# Altium PCB PCB2.PcbDoc
Units mm, origin at the board's own origin, x right, y up, seen from the top; angles counter-clockwise.
Board outline 146.05 x 94.87 mm, 2 copper layers (Top Layer, Bottom Layer); 31 components, 27 nets, 109 pads, 18 vias.
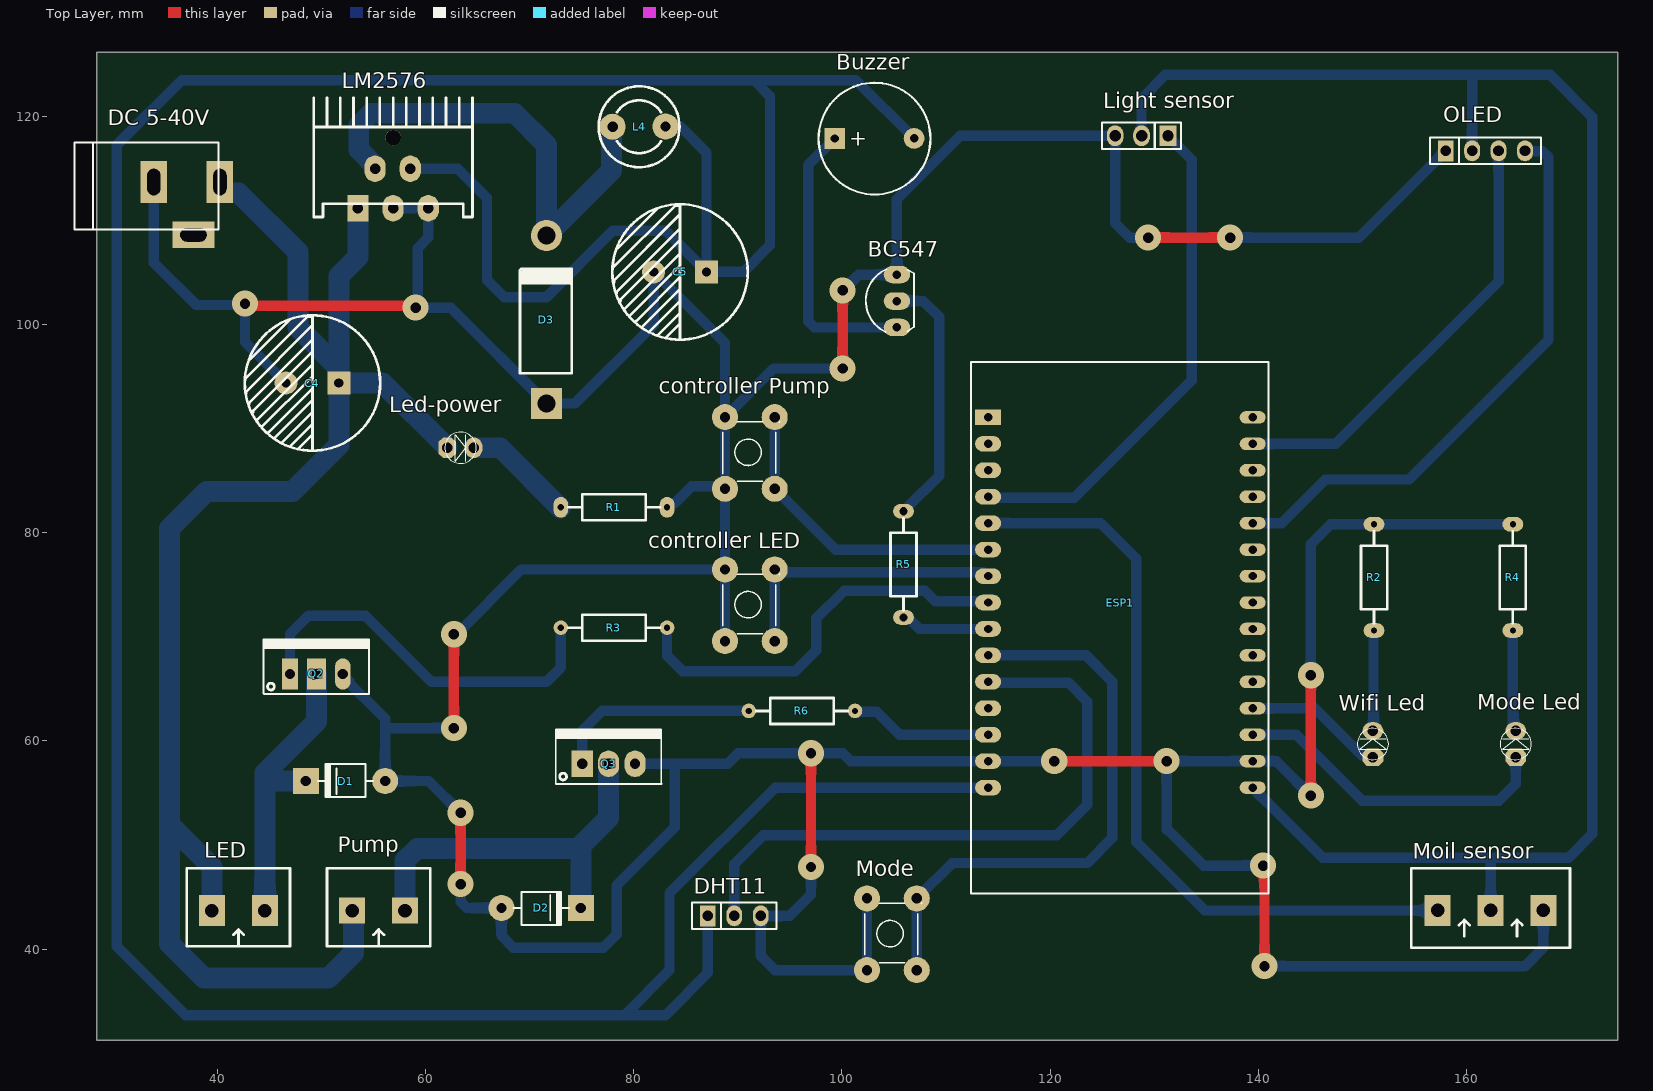
[diagram p0: Top Layer view]
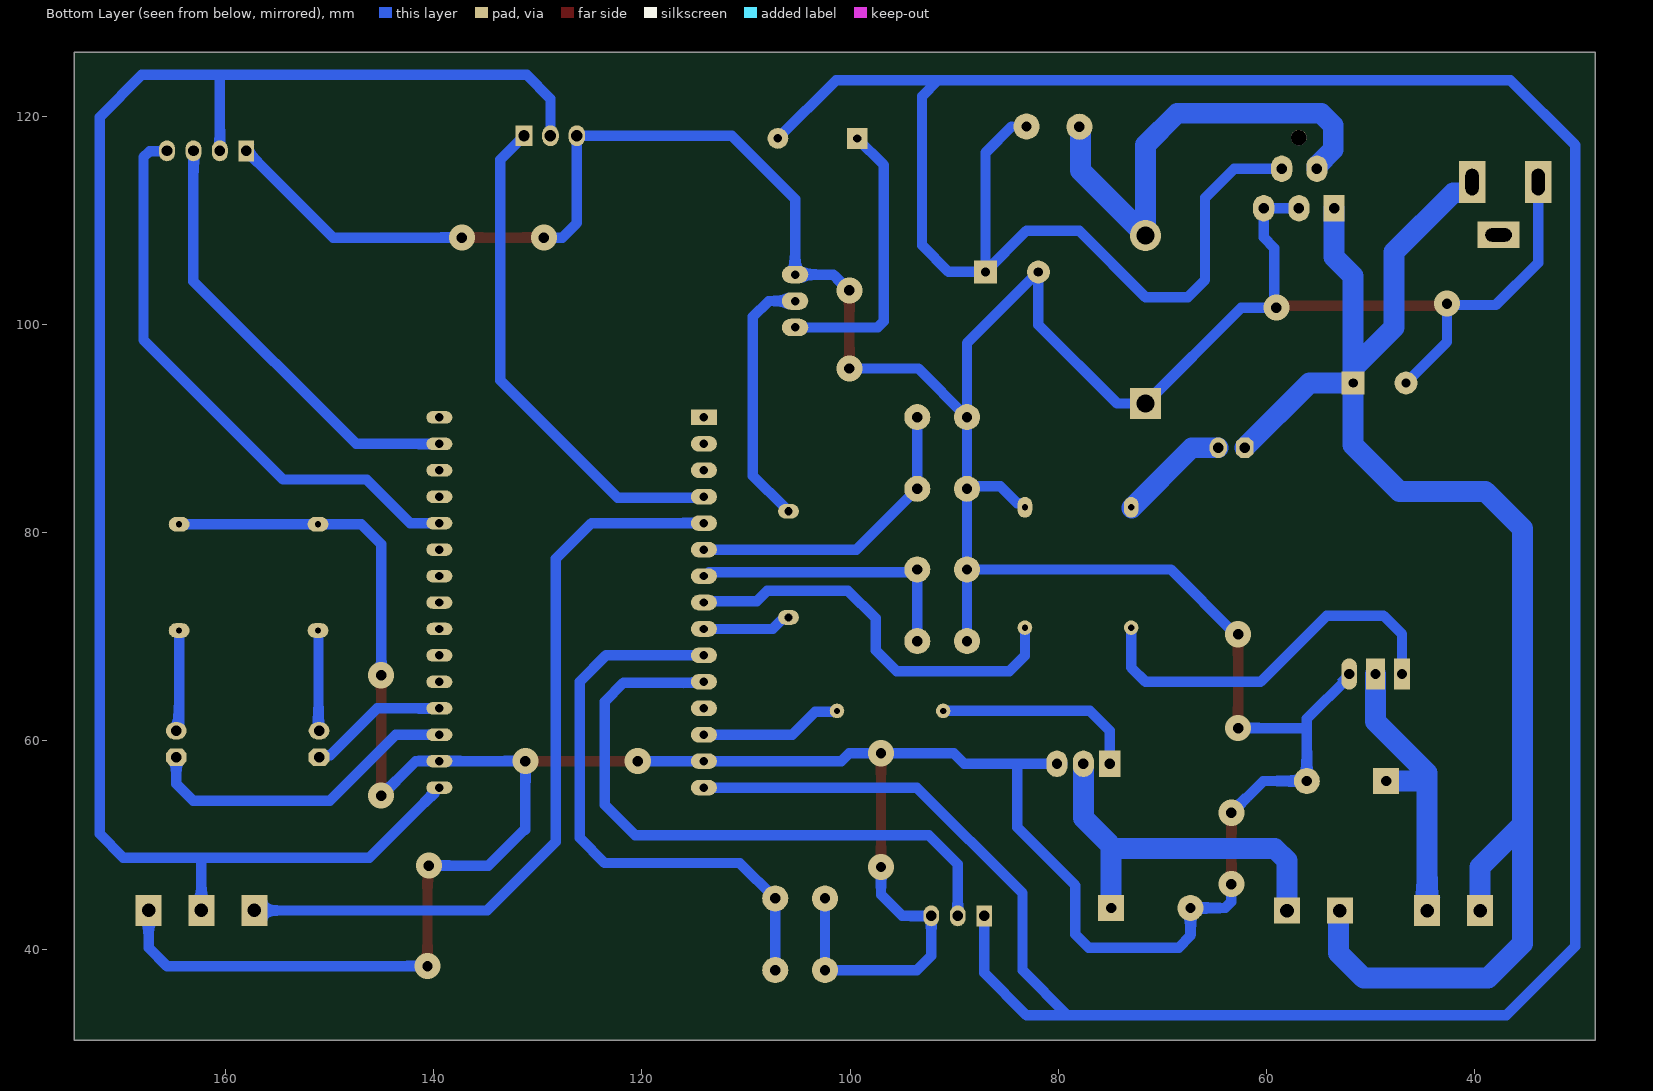
[diagram p1: Bottom Layer view, seen from below]
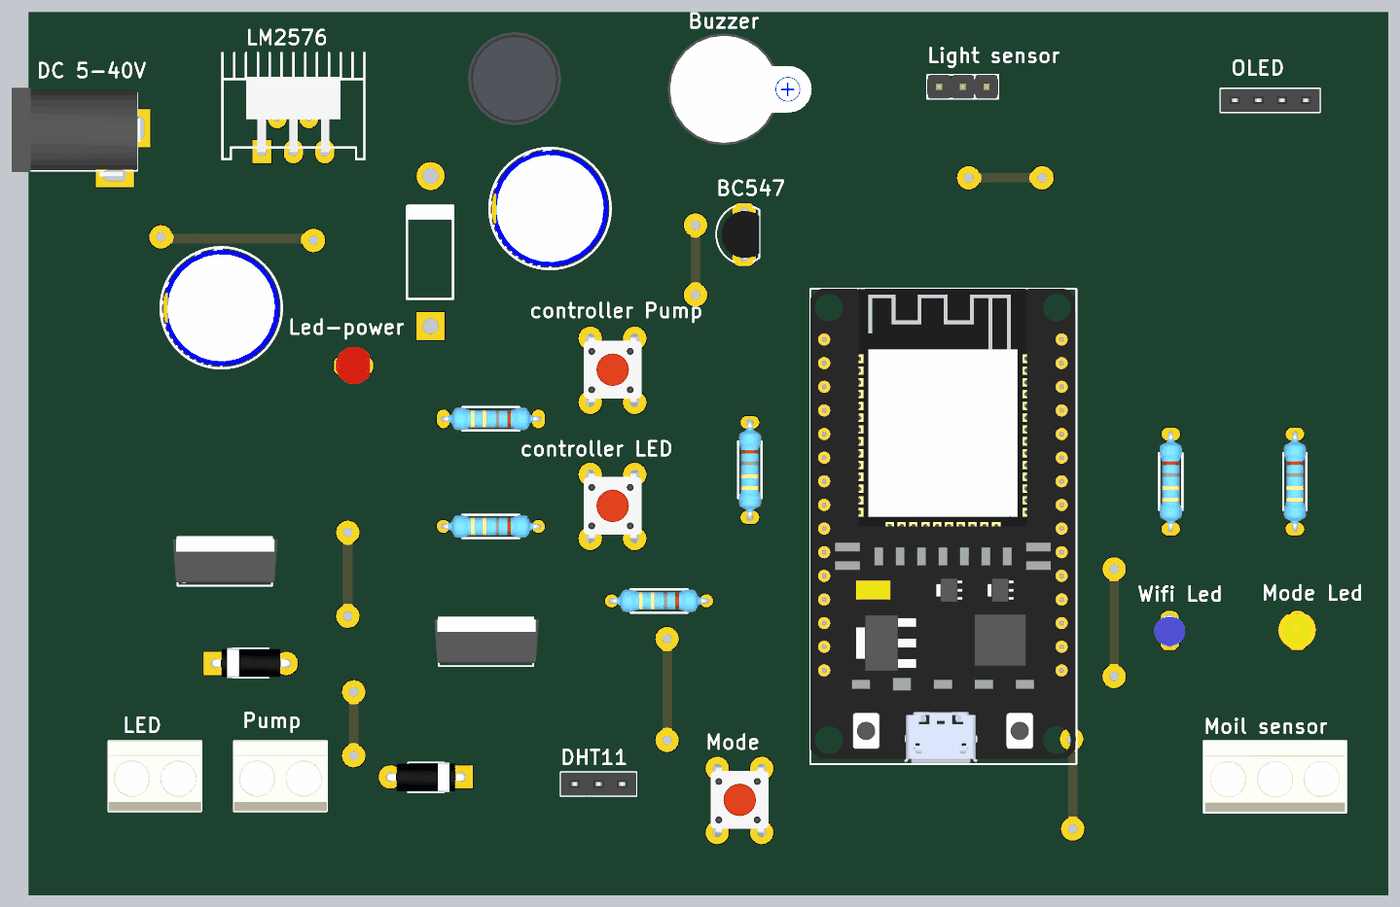
[diagram p2: 3D render of the assembled board from above, using the file's embedded part models]

## Layer stack, top to bottom
Top Solder: solder mask 0.0102, Solder Resist, Dk 3.5
Top Layer: signal copper 0.0356
Dielectric 1: dielectric 0.32, FR-4, Dk 4.8
Bottom Layer: signal copper 0.0356
Bottom Solder: solder mask 0.0102, Solder Resist, Dk 3.5

## Board outline
28.448,31.242 174.498,31.242 174.498,126.111 28.448,126.111

## Design rules (kind name [scope] priority, off if disabled: settings)
Clearance [All] p1: gap=0.254 ignorepadtopadclearanceinfootprint=FALSE except(0: Arc-Hole Track-Hole SMDPad-Hole THPad-Hole Via-Hole Fill-Hole Poly-Hole Region-Hole Text-Hole)
PolygonConnect [All] p1: connectstyle=Relief reliefconductorwidth=0.254 reliefentries=4 polygonreliefangle="90 Angle" airgapwidth=0.254
RoutingVias [All] p1: holewidth=1 width=2.5 viastyle="Through Hole" minholewidth=1 minwidth=2.5 maxholewidth=1 maxwidth=2.5
SolderMaskExpansion [All] p1: expansion=0.102 istentingtop=FALSE
Width [All] p1: maxlimit=2 minlimit=0.254 preferedwidth=1 toplayer_maxwidth=1 toplayer_prefwidth=0.254 bottomlayer_minwidth=1 minimp=50.000000 maximp=50.000000 favimp=50.000000
30 further rules are at their usual default settings.

## Components (designator, comment, footprint, x,y, rotation, side; value= is the part's Value field where it differs from the comment)
BC547 "BC 546" QTO-92 105.283,102.235 r90 top value="BC 546,BC 547,BC 548" (schematic designator Q1)
Buzzer "Coi Chip Speaker" "Coi Chip Speacker" 99.314,117.843 r0 top (schematic designator LS1)
C4 "1000uF" "tu hoa 13mm" 49.149,94.361 r180 top
C5 "1000uF" "tu hoa 13mm" 84.455,105.029 r180 top
"controller LED" "SW" SW4 88.57,69.901 r90 top value="Button chip 4 pin" (schematic designator SW2)
"controller Pump" "SW" SW4 88.57,84.531 r90 top value="Button chip 4 pin" (schematic designator SW1)
D1 "100v" "DIODE 1A" 57.404,56.134 r0 top
D2 "100v" "DIODE 1A" 66.04,43.942 r180 top
D3 "1N5822" "DIODE 10A" 71.628,100.457 r90 top
"DC 5-40V" "POWER" DC-IN 37.084,111.125 r0 top (schematic designator ON/OFF1)
DHT11 "JP 1x3 2.54" "JP 1x3 CT" 87.122,43.18 r0 top (schematic designator JP2)
ESP1 "ESP32 DEVKIT" "ESP32 WROOM 32 KIT" 114.046,91.059 r0 top
L4 "Conductor" "CUON CAM 200mil" 80.518,118.974 r0 top
LED "KF2" KF2-5.08#1 42.037,43.688 r180 top (schematic designator J3)
Led-power "LED 3mm" LED-3MM-RED 62.103,88.138 r0 top (schematic designator L1)
"Light sensor" "JP 1x3 2.54" "JP 1x3 DT" 131.318,118.11 r180 top (schematic designator JP?)
LM2576 "LM2576T-5.0" LM2576t 56.871,115.392 r0 top (schematic designator U2)
Mode "SW" SW4 102.21,38.303 r90 top value="Button chip 4 pin" (schematic designator SW3)
"Mode Led" "LED 3mm" LED-3MM-YELLOW 164.719,58.42 r90 top (schematic designator L3)
"Moil sensor" "KF3" KF3-5.08 157.226,43.701 r0 top (schematic designator J1)
OLED "JP4" JP4-C1T 157.988,116.656 r0 top (schematic designator C3)
Pump "KF2" KF2-5.08#2 55.499,43.688 r180 top (schematic designator J4)
Q2 "TIP122" QTO-220#1 46.99,66.421 r0 top
Q3 "TIP122" QTO-220#2 75.057,57.785 r0 top
R1 "2k" "tro vach 1/4w"#1 78.105,82.423 r0 top
R2 "330" "tro vach 1/4w"#1 151.111,75.692 r90 top
R3 "330" "tro vach 1/4w"#2 78.105,70.866 r0 top
R4 "330" "tro vach 1/4w"#1 164.445,75.692 r90 top
R5 "1k" "tro vach 1/4w"#3 105.918,76.942 r90 top
R6 "330" "tro vach 1/4w"#2 96.159,62.865 r0 top
"Wifi Led" "LED 3mm" LED-3MM-BLUE 151.003,59.817 r90 top (schematic designator L2)

## Footprints (in the part's own frame and the unit in brackets; to place one, negate y for a bottom-side part, rotate by r counter-clockwise, add the part's x,y. Pads: shape width x height; smd on the part's side, far side on the other; paste and mask are expansions set on the pad)
"Coi Chip Speacker" [mm]
  rect 2x2 hole 0.8: 1(0,0)
  round 2 hole 0.8: 2(7.62,0.013)
  silkscreen extent -1.55,-5.38 9.18,5.36, body extent -2.22,-6 13.24,6, height 4.5
"CUON CAM 200mil" [mm]
  round 2.5 hole 1: 1(-2.54,0) 2(2.54,0.025)
  silkscreen extent -3.88,-3.89 3.89,3.89, body extent -4.87,-4.98 5.13,5.02, height 12.02
DC-IN [mil] "Jac DC input"
  rect 100x160 hole 50 slot 100 at 90 deg: 1(125,100) 2(-125,100)
  rect 160x100 hole 50 slot 100 at 0 deg: 3(25,-100)
  silkscreen extent -425,-80 120,250, body extent -410,-105 134,269, height 434
"DIODE 1A" [mm] "Diode 1A"
  round 2.5 hole 1: 1(-1.27,0)
  rect 2.5x2.5 hole 1: 2(-8.89,0)
  silkscreen extent -7.75,-1.55 -2.41,1.65, body extent -9.29,-1.55 -0.87,1.65, height 3.1
"DIODE 10A" [mm]
  rect 3x3 hole 1.7: 1(-8.064,0)
  round 3 hole 1.7: 2(8.064,0)
  silkscreen extent -5.14,-2.41 4.89,2.54
"ESP32 WROOM 32 KIT" [mm]
  rect 2.5x1.5 hole 0.8: 1(0,0)
  oval 2.5x1.5 hole 0.8: 2(0,-2.54) 3(0,-5.08) 4(0,-7.62) 5(0,-10.16) 6(0,-12.7) 7(0,-15.24) 8(0,-17.78) 9(0,-20.32) 10(0,-22.86) 11(0,-25.4) 12(0,-27.94) 13(0,-30.48) 14(0,-33.02) 15(0,-35.56)
  oval 2.5x1.2 hole 0.8: 16(25.4,-35.56) 17(25.4,-33.02) 18(25.4,-30.48) 19(25.4,-27.94) 20(25.4,-25.4) 21(25.4,-22.86) 22(25.4,-20.32) 23(25.4,-17.78) 24(25.4,-15.24) 25(25.4,-12.7) 26(25.4,-10.16) 27(25.4,-7.62) 28(25.4,-5.08) 29(25.4,-2.54) 30(25.4,0)
  silkscreen extent -1.65,-45.72 26.92,5.33, body extent -1.65,-45.6 26.85,5.33, height 10.49
JP4-C1T [mm] "4 row, straight, gold plating"
  rect 1.52x2 hole 1.02: 1(0,0)
  oval 1.52x2 hole 1.02: 2(2.54,0) 3(5.08,0) 4(7.62,0)
  silkscreen extent -1.52,-1.27 9.14,1.27, body extent -1.52,-1.25 9.14,1.25, height 8.51
"JP 1x3 CT" [mm]
  rect 1.52x2 hole 1.02: 1(0,0)
  oval 1.52x2 hole 1.02: 2(2.54,0) 3(5.08,0)
  silkscreen extent -1.52,-1.27 6.6,1.27, body extent -1.52,-1.25 6.6,1.25, height 8.51
"JP 1x3 DT" [mm]
  rect 1.6x2 hole 1.1: 1(0,0)
  oval 1.6x2 hole 1.1: 2(2.54,0) 3(5.08,0)
  silkscreen extent -1.27,-1.27 6.35,1.27, body extent -1.27,-1.27 6.35,1.27, height 8.54
KF2-5.08#1 [mm]
  rect 2.5x3 hole 1.3: 1(-2.54,0) 2(2.54,0)
  silkscreen extent -4.95,-4.08 4.95,3.43, body extent -5,-4.07 5,3.43, height 10
KF2-5.08#2 [mm]
  rect 2.5x2.5 hole 1.3: 1(-2.54,0) 2(2.54,0)
  silkscreen extent -4.95,-4.08 4.95,3.43, body extent -5,-4.07 5,3.43, height 10
KF3-5.08 [mm]
  rect 2.5x3 hole 1.3: 1(0,0) 2(5.08,0) 3(10.147,0)
  silkscreen extent -2.54,-3.58 12.7,4.06, body extent -2.42,-3.51 12.58,3.99, height 10
LED-3MM-BLUE [mil]
  oct 65x78.74 hole 40: 1(-55,0)
  oval 65x78.74 hole 40: 2(45,0)
  silkscreen extent -64,-59 54,59, body extent -72,-65 54,65, height 184
LED-3MM-RED [mil]
  oct 65x78.74 hole 40: 1(0,0)
  oval 65x78.74 hole 40: 2(100,0)
  silkscreen extent -9,-59 109,59, body extent -27,-77 117,80, height 181
LED-3MM-YELLOW [mil]
  oct 65x78.74 hole 40: 1(0,0)
  oval 65x78.74 hole 40: 2(100,0)
  silkscreen extent -9,-59 109,59, body extent -27,-77 117,80, height 181
LM2576t [mil]
  rect 80x100 hole 40: 1(-132,-167.09)
  oval 80x100 hole 40: 2(-67,-18) 3(1,-167) 4(66,-18) 5(134,-167)
  round 59.06 hole 59.06: ""(1,100)
  silkscreen extent -299,-200 301,250, body extent -199,-175 201,150, height 859
QTO-92 [mil] "TO-92"
  oval 66x100 hole 32: 1(-100,0) 2(0,0) 3(100,0)
  silkscreen extent -117,-65 120,118, body extent -109,-66 109,95, height 245
QTO-220#1 [mm] "TO-220 - 1-2-3"
  rect 1.5x3 hole 0.991: 1(0,0)
  rect 1.8x3 hole 0.991: 2(2.54,0)
  oval 1.5x3 hole 0.991: 3(5.08,0)
  silkscreen extent -2.54,-1.93 7.62,3.3, body extent -3.02,-1.63 8.19,3.06, height 19.17
QTO-220#2 [mm] "TO-220 - 1-2-3"
  rect 2.032x2.54 hole 0.991: 1(0,0)
  oval 2.032x2.54 hole 0.991: 2(2.54,0) 3(5.08,0)
  silkscreen extent -2.54,-1.93 7.62,3.3, body extent -3.02,-1.63 8.19,3.06, height 19.17
SW4 [mm] "SW button 4pin, 250 x250 mil"
  round 2.5 hole 1: 1(-0.33,-0.203) 1(6.553,-0.203) 2(-0.33,-4.978) 2(6.553,-4.978)
  silkscreen extent 0.38,-5.46 6.1,0, body extent -0.77,-5.71 7.12,0.48, height 7
"tro vach 1/4w"#1 [mm]
  oval 1.4x2 hole 0.6: 1(-5.1,0) 2(5.1,0)
  silkscreen extent -4.39,-1.25 4.42,1.25, body extent -5.38,-1.2 5.38,1.2, height 2.41
"tro vach 1/4w"#2 [mm]
  round 1.4 hole 0.6: 1(-5.1,0) 2(5.1,0)
  silkscreen extent -4.39,-1.25 4.42,1.25, body extent -5.38,-1.2 5.38,1.2, height 2.41
"tro vach 1/4w"#3 [mm]
  oval 1.4x2 hole 0.8: 1(-5.1,0) 2(5.1,0)
  silkscreen extent -4.39,-1.25 4.42,1.25, body extent -5.38,-1.2 5.38,1.2, height 2.41
"tu hoa 13mm" [mm]
  rect 2.2x2.2 hole 0.9: 1(-2.54,0)
  round 2.2 hole 0.9: 2(2.54,0)
  silkscreen extent -6.5,-6.5 6.5,6.5, body extent -6.25,-6.25 6.26,6.25, height 23.02

## Part data
BC547: "NPN 625mW, CBE"
Buzzer: "Còi chip"
C4: library part "Tu Hoa 1000uF 25V 13x21", "Cắm", Chung_Loai=Cắm, Don_Vi=Con, Ma_Hang=MH002315, So_Chan=2, Ten_Linh_Kien="Tụ Hóa 1000uF 25V 13x21MM"
C5: library part "Tu Hoa 1000uF 50V 13x26", "Cắm", Chung_Loai=Cắm, Don_Vi=Con, Ma_Hang=MH006619, So_Chan=2, Ten_Linh_Kien="Tụ Hóa 1000uF 50V"
"controller LED" "controller Pump" Mode: library part SW4, "Switch button 4 pin"
D1 D2: library part "Diode 1N4007", "Cắm", Chung_Loai=Cắm, Don_Vi=Con, Ma_Hang=MH001063, Ten_Linh_Kien="Diode 1N4007 1A (DIP)"
D3: library part "DIODE Schottky"
"DC 5-40V": library part DCIN
DHT11: library part "JP 1x3 2.54 Cai Thang", "Cắm", Chung_Loai=Cắm, Don_Vi=Con, Ma_Hang=MH004006, Ten_Linh_Kien="Jump Đơn Cái 2.54MM 1x20P Thẳng"
ESP1: library part "ESP32 WROOM 32 KIT"
LED Pump: Manufacturer="Würth Elektronik eiSos GmbH", partNo=691103110002, ComponentLink1 Description=Manufacturer, ComponentLink1URL=http://www.we-online.com, ComponentLink2 Description=Datasheet, ComponentLink2URL=http://katalog.we-online.de/em/datasheet/6911031100xx.pdf, Created by="Karrer Zheng", Created Date="29 October 2013", NoPins=2
Led-power: library part "LED 3mm Do", "Cắm", Chung_Loai=Cắm, Don_Vi=Con, Ma_Hang=MH003892, Ten_Linh_Kien="Led 3MM Phủ Đỏ (10c)"
"Light sensor": library part "JP 1x3 2.54 Duc Thang", "Cắm", Chung_Loai=Cắm, Don_Vi=Con, Ma_Hang=MH000903, Ten_Linh_Kien="Jump Đơn Đực 2.54MM 1x40P Thẳng 11MM"
LM2576: "SIMPLE SWITCHER; 3A Step-Down Voltage Regulator", DigiKeyPartNumber=LM2576T-5.0-ND, Manufacturer="National Semiconductor", PackageTopMarking="NSUZXYTT*LM2576T*-5.0 P+", PowerWise=N, Code_JEDEC=TO-220-AB, ComponentLink1Description="LM2576 Datasheet", ComponentLink1URL=http://www.national.com/ds/LM/LM2576.pdf, ComponentLink2Description="LM2576 Web Page", ComponentLink2URL=http://www.national.com/pf/LM/LM2576.html, ComponentLink3Description="T05A Package Page", ComponentLink3URL=http://www.national.com/packaging/folders/t05a.html, CompType=Switcher, DatasheetVersion=Aug-2004, FirstPublished=4-Dec-2008, PackageDescription="TO-220, Molded, 5 Lead, Straight", PackageReference=T05A, PackageVersion="revJ, Jan-1992", PartNumber=LM2576T-5.0, PinCount=5, Publisher="Altium Limited", RoHS=O
"Mode Led": library part "LED 3mm Vang", "Cắm", Chung_Loai=Cắm, Don_Vi=Con, Ma_Hang=MH003893, Ten_Linh_Kien="Led 3MM Phủ Vàng (10c)"
"Moil sensor": Manufacturer="Würth Elektronik eiSos GmbH", partNo=691103110003, ComponentLink1 Description=Manufacturer, ComponentLink1URL=http://www.we-online.com, ComponentLink2 Description=Datasheet, ComponentLink2URL=http://katalog.we-online.de/em/datasheet/6911031100xx.pdf, Created by="Karrer Zheng", Created Date="29 October 2013", NoPins=3
OLED: "WR-PHD 2.54 mm Angled Socket Header", Manufacturer="W¨¹rth Elektronik eiSos GmbH", partNo=613004143121, ComponentLink1 Description=Manufacturer, ComponentLink1URL=http://www.we-online.com, ComponentLink2 Description=Datasheet, ComponentLink2URL=http://katalog.we-online.de/em/datasheet/6130xx143121.pdf, Created by="Karrer Zheng", Created Date="29 March 2013", NoPins=04
Q2 Q3: "Darlington Silicon Power NPN Transistor, 8 Amp, 100 Volts and 65 Watts"
R1 R2 R3 R4 R5 R6: library part "Tro Vach 1/4W 5% 1k", "Cắm", Chung_Loai=Cắm, Don_Vi=Con, Ma_Hang=MH007390, So_Chan=2, Ten_Linh_Kien="Trở Vạch 1/4w 5% 1k"
"Wifi Led": library part "LED 3mm Xanh Duong", "Cắm", Chung_Loai=Cắm, Don_Vi=Con, Ma_Hang=MH009003, Ten_Linh_Kien="LED 3MM Xanh Dương SS (1000c)"

## Via types
v1: diameter 2.5, hole 1, Top Layer to Bottom Layer, 18 vias

## Nets (pads, with @x,y where several pads share a name; then routed paths per layer and width w, separated by ;. In a path a pad name is that pad's centre, name@x,y a point inside that pad or via, vN(x,y) a via of type N, cw(c..) or ccw(c..) an arc to the next point about the centre after c; other vN are vias at no path point)
3V3: "Light sensor.2" "Moil sensor.2" ESP1.16 OLED.2 | length 167.2
  Bottom Layer w1: 128.778,118.11 128.778,121.666 131.064,123.952 160.782,123.952 ; ESP1.16 146.177,48.768 162.179,48.768 ; OLED.2 160.528,123.698 160.782,123.952 ; 162.306,43.701 162.306,48.641 162.179,48.768 ; 160.782,123.952 168.021,123.952 172.085,119.888 172.085,51.054 169.799,48.768 162.179,48.768
+5: Buzzer.2 C5.1 DHT11.1 ESP1.15 L4.2 LM2576.4 | length 354.5
  Bottom Layer w1: LM2576.4 63.119,114.935 65.913,112.141 65.913,104.267 67.564,102.616 71.628,102.616 77.978,108.966 83.058,108.966 C5.1 ; 84.455,118.999 86.995,116.459 C5.1 ; DHT11.1 87.122,37.719 83.058,33.655 79.121,33.655 ; Buzzer.2 101.346,123.444 91.567,123.444 ; ESP1.15 93.599,55.499 83.439,45.339 83.439,37.973 79.121,33.655 ; 79.121,33.655 36.957,33.655 30.353,40.259 30.353,117.221 36.576,123.444 91.567,123.444 ; C5.1 90.551,105.029 93.091,107.569 93.091,121.92 91.567,123.444
"Controller LED-12V": "controller LED.2" ESP1.7 | length 27.6
  Bottom Layer w1: 93.548,69.571 93.548,76.2 93.548,76.454 93.721,76.281 94.361,76.281 94.442,76.2 113.524,76.2 113.905,75.819 ESP1.7
"Controller Pump": "controller Pump.2" ESP1.6 | length 29.8
  Bottom Layer w1: 93.548,91.084 93.548,84.201 99.39,78.359 ESP1.6
Còi: ESP1.9 R5.1 | length 8.6
  Bottom Layer w1: R5.1 106.326,71.842 107.429,70.739 ESP1.9
DHT: DHT11.2 ESP1.11 | length 61.4
  Bottom Layer w1: DHT11.2 89.662,48.133 92.456,50.927 120.65,50.927 123.571,53.848 123.571,63.754 121.765,65.56 114.145,65.56 ESP1.11
GND: "controller LED.1" "controller Pump.1" "DC 5-40V.2" "Light sensor.3" "Moil sensor.3" BC547.3 C4.2 C5.2 D1.1 D2.1 D3.1 DHT11.3 ESP1.14 ESP1.17 LM2576.3 LM2576.5 Mode.1 OLED.1 Q2.3 Q3.3 R1.2 R2.2 R4.2 | length 560.3
  Top Layer w1: v1(42.672,101.981) 42.862,101.79 58.864,101.79 v1(59.055,101.6) ; v1(62.738,61.214) v1(62.738,70.231) ; v1(63.373,46.228) v1(63.373,53.086) ; v1(97.028,47.879) v1(97.028,58.801) ; v1(100.076,95.758) v1(100.076,103.251) ; v1(120.396,58.039) v1(131.191,58.039) ; v1(129.413,108.331) v1(137.287,108.331) ; v1(140.462,48.006) 140.558,47.91 140.558,47.521 140.589,47.49 v1(140.589,38.354) ; v1(145.034,54.737) v1(145.034,66.294)
  Bottom Layer w1: 33.909,113.665 33.909,105.918 37.973,101.854 42.545,101.854 v1(42.672,101.981) 42.672,98.298 C4.2 ; Q2.3 52.07,66.167 56.134,62.103 56.134,61.341 ; LM2576.3 LM2576.5 60.274,108.356 59.245,107.328 59.245,101.79 v1(59.055,101.6) 62.421,101.6 D3.1 74.359,92.393 81.915,99.949 C5.2 88.773,98.171 88.773,91.084 ; v1(62.738,61.214) 56.261,61.214 56.134,61.341 ; v1(62.738,70.231) 62.992,70.231 69.215,76.454 88.773,76.454 ; v1(63.373,46.228) 63.373,44.528 63.959,43.942 D2.1 67.31,41.275 68.453,40.132 77.089,40.132 78.359,41.402 78.359,46.101 83.947,51.689 83.947,57.785 ; v1(63.373,53.086) 60.325,56.134 D1.1 56.134,61.341 ; Q3.3@79.627,57.785 Q3.3 83.947,57.785 ; R1.2 83.205,82.615 83.39,82.8 83.943,82.8 85.598,84.455 88.519,84.455 88.773,84.201 ; 88.773,69.571 88.773,76.454 ; v1(97.028,47.879) 97.028,45.212 94.996,43.18 DHT11.3 92.202,39.37 93.599,37.973 102.413,37.973 Mode.1@102.413,44.856 ; v1(100.076,95.758) 93.447,95.758 88.773,91.084 ; v1(100.076,103.251) 101.6,104.775 BC547.3 105.283,112.014 111.379,118.11 126.238,118.11 126.238,109.728 127.635,108.331 v1(129.413,108.331) ; v1(120.396,58.039) ESP1.14 100.838,58.039 100.076,58.801 v1(97.028,58.801) 90.043,58.801 89.027,57.785 83.947,57.785 ; v1(137.287,108.331) 149.663,108.331 OLED.1 ; v1(140.462,48.006) 134.747,48.006 131.318,51.435 131.191,51.435 v1(131.191,58.039) ESP1.17 141.732,58.039 v1(145.034,54.737) ; v1(140.589,38.354) 165.608,38.354 167.373,40.119 167.373,43.701 ; v1(145.034,66.294) 145.034,78.867 146.959,80.792 R2.2 R4.2 ; 88.773,76.454 88.773,84.201 ; 88.773,84.201 88.773,91.084
LED-12V: ESP1.8 R3.2 | length 39.6
  Bottom Layer w1: R3.2 83.205,68.179 84.709,66.675 95.504,66.675 97.536,68.707 97.536,71.755 100.203,74.422 107.95,74.422 108.966,73.406 113.065,73.406 113.097,73.375 113.95,73.375 ESP1.8
"light sensor": "Light sensor.1" ESP1.4 | length 48.7
  Bottom Layer w1: ESP1.4 114.145,83.34 122.329,83.34 124.206,85.217 133.604,94.615 133.604,115.824 131.318,118.11
Mode: ESP1.10 Mode.2 | length 56.1
  Bottom Layer w1: Mode.2@107.188,37.973 107.188,44.856 110.592,48.26 123.571,48.26 125.984,50.673 125.984,65.659 123.444,68.199 ESP1.10
ModeLed: "Mode Led.1" ESP1.18 | length 31.1
  Bottom Layer w1: ESP1.18 143.637,60.579 149.987,54.229 163.068,54.229 164.719,55.88 164.719,58.42
NetD1_2: D1.2 LED.1 Q2.2 | length 28.8
  Bottom Layer w2: LED.1 44.577,56.388 ; D1.2 44.831,56.134 44.577,56.388 ; Q2.2 49.524,66.415 49.524,61.843 44.577,56.896 44.577,56.388
NetD2_2: D2.2 Pump.1 Q3.2 | length 37.1
  Bottom Layer w2: Pump.1 58.039,48.485 59.211,49.657 74.93,49.657 ; D2.2 74.93,49.911 75.184,50.165 77.597,52.578 Q3.2
NetD3_2: D3.2 L4.1 LM2576.2 | length 46.4
  Bottom Layer w2: LM2576.2 55.169,115.198 53.594,116.772 53.594,119.097 54.766,120.269 68.58,120.269 71.628,117.221 D3.2 77.882,114.775 77.882,118.878 L4.1
NetL1_2: Led-power.2 R1.1 | length 10.7
  Bottom Layer w2: Led-power.2 67.183,88.138 R1.1@72.955,82.366
NetL2_2: "Wifi Led.2" R2.1 | length 9.7
  Bottom Layer w1: 151.003,60.96 151.057,61.014 151.057,70.538 R2.1
NetL3_2: "Mode Led.2" R4.1 | length 9.7
  Bottom Layer w1: R4.1 164.445,61.41 164.719,61.136 164.719,60.96
NetLS1_1: BC547.1 Buzzer.1 | length 27.4
  Bottom Layer w1: Buzzer.1 96.774,115.303 96.774,100.281 97.36,99.695 BC547.1
NetQ1_2: BC547.2 R5.2 | length 24.9
  Bottom Layer w1: BC547.2 107.823,102.235 109.347,100.711 109.347,85.471 106.295,82.419 106.295,82.227 106.11,82.042 R5.2
NetQ2_1: Q2.1 R3.1 | length 37.6
  Bottom Layer w1: Q2.1 46.99,70.231 48.768,72.009 54.229,72.009 60.579,65.659 71.628,65.659 73.005,67.036 R3.1
NetQ3_1: Q3.1 R6.1 | length 20
  Bottom Layer w1: Q3.1 75.057,60.96 76.962,62.865 R6.1
Pump: ESP1.13 R6.2 | length 13.7
  Bottom Layer w1: R6.2 101.336,62.788 103.328,62.788 105.537,60.579 ESP1.13
SCL: ESP1.29 OLED.3 | length 42.6
  Bottom Layer w1: ESP1.29 147.447,88.519 163.068,104.14 OLED.3
SDA: ESP1.26 OLED.4 | length 55.7
  Bottom Layer w1: ESP1.26 142.24,80.899 146.431,85.09 154.432,85.09 167.868,98.526 167.868,116.026 167.282,116.612 165.652,116.612 OLED.4
"soil sensor": "Moil sensor.1" ESP1.5 | length 74.5
  Bottom Layer w1: ESP1.5 124.841,80.899 128.27,77.47 128.27,50.292 134.861,43.701 157.226,43.701
VCC: "DC 5-40V.1" C4.1 Led-power.1 LED.2 LM2576.1 Pump.2 | length 153.4
  Bottom Layer w2: LED.2 39.497,47.879 35.433,51.943 ; 40.259,113.665 40.259,112.903 40.529,112.633 42.053,112.633 47.752,106.934 47.752,99.695 51.589,95.858 ; Pump.2 53.086,43.561 53.086,39.624 50.673,37.211 38.735,37.211 35.433,40.513 35.433,51.943 ; LM2576.1 53.518,106.477 51.689,104.648 51.689,95.858 C4.1 ; Led-power.1 55.88,94.361 C4.1 ; 35.433,51.943 35.433,80.391 38.989,83.947 47.244,83.947 51.689,88.392 C4.1
WifiLed: "Wifi Led.1" ESP1.19 | length 13.5
  Bottom Layer w1: ESP1.19 145.415,63.119 149.908,58.626 150.797,58.626 151.003,58.42
pads on no net: "DC 5-40V.3" ESP1.1 ESP1.2 ESP1.3 ESP1.12 ESP1.20 ESP1.21 ESP1.22 ESP1.23 ESP1.24 ESP1.25 ESP1.27 ESP1.28 ESP1.30 LM2576.

## Text inside footprints (layer, text, board x,y; h text height)
Buzzer: Top Overlay "+" at 100.724,117.132 h1.52